# EAGLE board main (EAGLE 7.0.0)
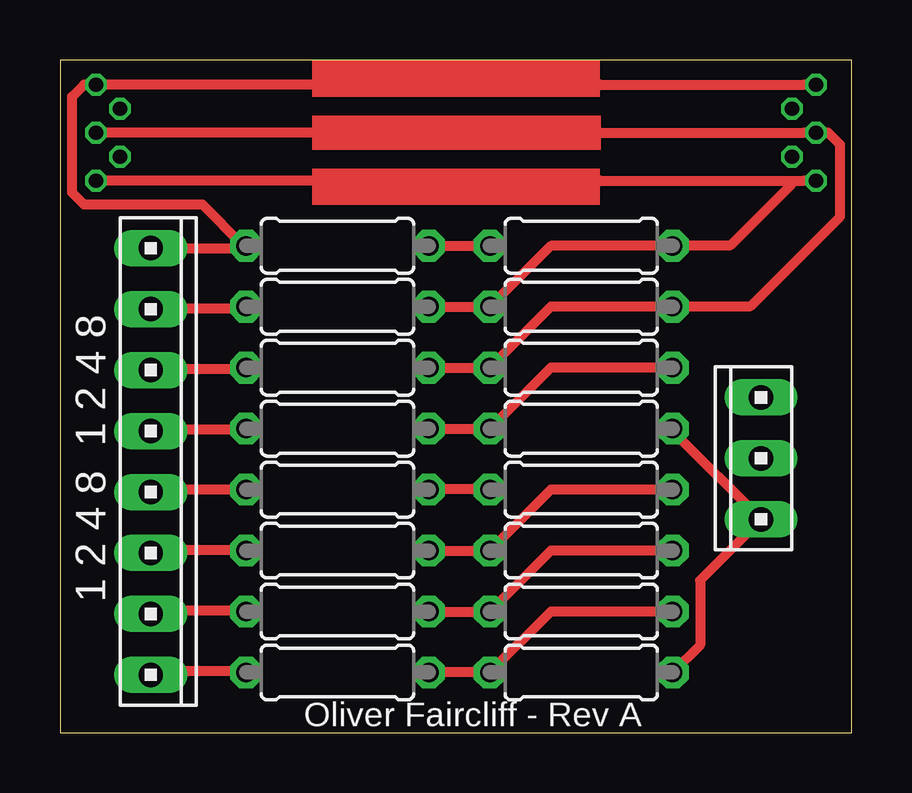
[diagram p0: board, top side]
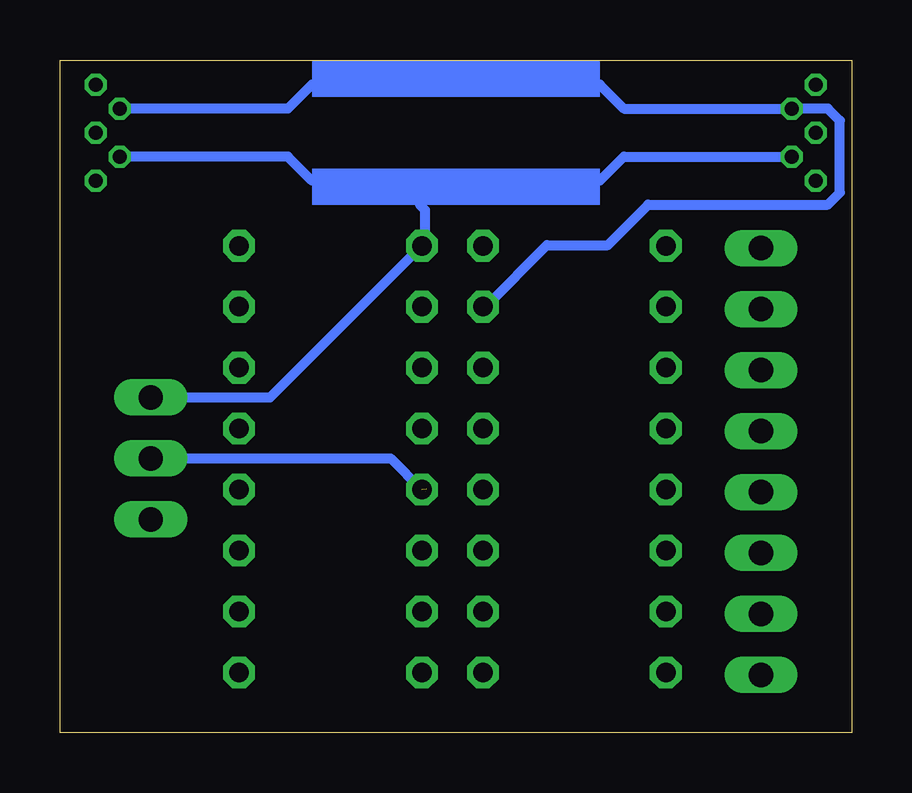
[diagram p1: board, bottom side, seen from below]

Size 32.99 x 28.03 mm. Coordinates in mm from the lower left corner, seen from the top.
Outline: 0,0 32.99,0 32.99,28.03 0,28.03 0,0
Copper layers (1*16): Top 0.035mm / dielectric 1.5mm / Bottom 0.035mm
Design rules "dirt_cheap_dirty_boards.v1": minimum track width 5mil, minimum drill 12mil, track to track 5mil, track to pad 5mil, pad to pad 5mil, via to via 5mil, smd to smd 0mil, copper to edge 10mil, drill to drill 10mil, minimum pad ring 10mil, minimum via ring 6mil, stop-mask expansion 2mil, vias tented up to drill 25mil, thermal gap 10mil

## Footprints (pad centres in the part's own frame; a part is rotated, then mirrored left to right if it is on the bottom)
10X08MTA = drill 1.016 long: 1 8.89,0; 2 6.35,0; 3 3.81,0; 4 1.27,0; 5 -1.27,0; 6 -3.81,0; 7 -6.35,0; 8 -8.89,0
10X03MTA = drill 1.016 long: 1 2.54,0; 2 0,0; 3 -2.54,0
0207/7 = drill 0.813 octagon: 1 -3.81,0; 2 3.81,0

## Placement (x,y rotation side)
INP  [10X08MTA]  3.78,11.3 270 top
OUT  G OUT  [10X03MTA]  29.21,11.43 90 top
R1  200k  [0207/7]  11.56,10.13 0 top
R2  200k  [0207/7]  11.56,7.59 0 top
R3  200k  [0207/7]  11.56,5.05 0 top
R4  200k  [0207/7]  11.56,2.51 0 top
R5  100k  [0207/7]  21.72,10.13 0 top
R6  100k  [0207/7]  21.72,7.59 0 top
R7  100k  [0207/7]  21.72,5.05 0 top
R8  200k  [0207/7]  21.72,2.51 0 top
R18  200k  [0207/7]  11.56,20.29 0 top
R19  200k  [0207/7]  11.56,17.75 0 top
R20  200k  [0207/7]  11.56,15.21 0 top
R21  200k  [0207/7]  11.56,12.67 0 top
R22  100k  [0207/7]  21.72,20.29 0 top
R23  100k  [0207/7]  21.72,17.75 0 top
R24  100k  [0207/7]  21.72,15.21 0 top
R26  200k  [0207/7]  21.72,12.67 0 top

## Library data of the parts
INP OUT = con-amp
R1-R8 R18-R24 R26 = resistor

## Nets
N$1: OUT.1 R18.2 R22.1
N$2: R20.2 R23.2 R24.1
N$3: R21.2 R24.2 R26.1
N$4: R19.2 R22.2 R23.1
N$5: INP.7 R19.1
N$6: INP.6 R20.1
N$7: INP.5 R21.1
N$8: INP.8 R18.1
N$10: R3.2 R6.2 R7.1
N$11: R4.2 R7.2 R8.1
N$12: R2.2 R5.2 R6.1
N$13: OUT.2 R1.2 R5.1
N$15: INP.3 R2.1
N$16: INP.2 R3.1
N$17: INP.1 R4.1
N$18: INP.4 R1.1
N$19: OUT.3 R8.2 R26.2

## Tracks (layer width: path | path; a pad name or v marks a point on that pad's centre or on a via)
N$1
  Top 0.406: R18.2 R22.1
  Bottom 0.406: OUT.1 24.23,13.97 R22.1
N$2
  Top 0.406: R20.2 R24.1 20.45,17.75 R23.2
N$3
  Top 0.406: R21.2 R26.1 20.45,15.21 R24.2
N$4
  Top 0.406: R19.2 R23.1 20.45,20.29 R22.2
N$5
  Top 0.254: 7.67,17.68 R19.1 | 3.79,17.68 INP.7
  Top 0.406: 3.79,17.68 7.67,17.68
N$6
  Top 0.254: 7.67,15.16 R20.1 | 3.79,15.16 INP.6
  Top 0.406: 3.79,15.16 7.67,15.16
N$7
  Top 0.254: 7.67,12.65 R21.1 | 3.79,12.65 INP.5
  Top 0.406: 3.79,12.65 7.67,12.65
N$8
  Top 0.254: 7.67,20.19 R18.1 | INP.8
  Top 0.406: INP.8 7.67,20.19
N$9
  Top 0.406: 22.5,27 31,27
N$10
  Top 0.406: R3.2 R7.1 20.45,7.59 R6.2
N$11
  Top 0.406: R4.2 R8.1 20.45,5.05 R7.2
N$12
  Top 0.406: R2.2 R6.1 20.45,10.13 R5.2
N$13  (1 unrouted)
  Top 0.254: 15.44,10.13 R1.2
  Top 0.406: 17.73,10.13 15.44,10.13
  Bottom 0.406: OUT.2 19.21,11.43 R5.1
N$14
  Top 0.406: 22.5,25 31,25
N$15
  Top 0.254: 7.67,7.62 R2.1 | 3.79,7.62 INP.3
  Top 0.406: 3.79,7.62 7.67,7.62
N$16
  Top 0.254: 7.67,5.11 R3.1 | 3.79,5.11 INP.2
  Top 0.406: 3.79,5.11 7.67,5.11
N$17
  Top 0.254: 7.67,2.59 R4.1 | 3.79,2.59 INP.1
  Top 0.406: 3.79,2.59 7.67,2.59
N$18
  Top 0.254: 7.67,10.13 R1.1 | 3.79,10.13 INP.4
  Top 0.406: 3.79,10.13 7.67,10.13
N$19
  Top 0.254: R26.2 25.53,12.57
  Top 0.406: 25.53,12.57 OUT.3 26.67,6.35 26.67,3.65 R8.2
N$20
  Top 0.406: 22.5,23 31,23
N$21
  Top 0.406: 10.5,27 2,27
N$22
  Top 0.406: 10.5,25 2,25
N$23
  Top 0.406: 10.5,23 2,23
N$24  (via drill 0.6 pad 0.41)
  Bottom 0.406: 10.5,27 9.5,26 v2.5,26
N$25  (via drill 0.6 pad 0.41)
  Bottom 0.406: 10.5,23 9.5,24 v2.5,24
N$26  (via drill 0.6 pad 0.41)
  Bottom 0.406: 22.5,23 23.5,24 v30.5,24
N$27  (via drill 0.6 pad 0.41)
  Bottom 0.406: 22.5,27 23.5,26 v30.5,26
N$28  (via drill 0.6 pad 0.41)
  other vias: 1.5,27
N$29  (via drill 0.6 pad 0.41)
  other vias: 1.5,25
N$30  (via drill 0.6 pad 0.41)
  other vias: 1.5,23
N$31  (via drill 0.6 pad 0.41)
  other vias: 31.5,27
N$32  (via drill 0.6 pad 0.41)
  other vias: 31.5,25
N$33  (via drill 0.6 pad 0.41)
  other vias: 31.5,23
N$34
  Top 0.406: 25.4,20.32 27.94,20.32 30.48,22.86
N$35
  Top 0.406: 25.4,17.78 28.78,17.78 32.5,21.5 32.5,24.5 32,25
N$36
  Top 0.406: 7.62,20.32 5.94,22 1,22 0.5,22.5 0.5,26.5 1,27
N$37
  Bottom 0.406: 17.78,20.32 17.78,21.78 18,22
N$38
  Bottom 0.406: 15.24,17.78 12.7,20.32 10.16,20.32 8.48,22 1,22 0.5,22.5 0.5,25.5 1,26 2,26
(copper drawn outside any net)
  shapes: Bottom area x4, Top area x10

## Text on the board
tPlace: 1 2 4 8 1 2 4 8
tNames: Oliver Faircliff - Rev A